# Altium PCB PTW_Mosfet_V1.0.PcbDoc
Units mm, origin at the board's own origin, x right, y up, seen from the top; angles counter-clockwise.
Board outline 17.13 x 12.5 mm, 2 copper layers (Top Layer, Bottom Layer); 18 components, 13 nets, 86 pads, 35 vias.
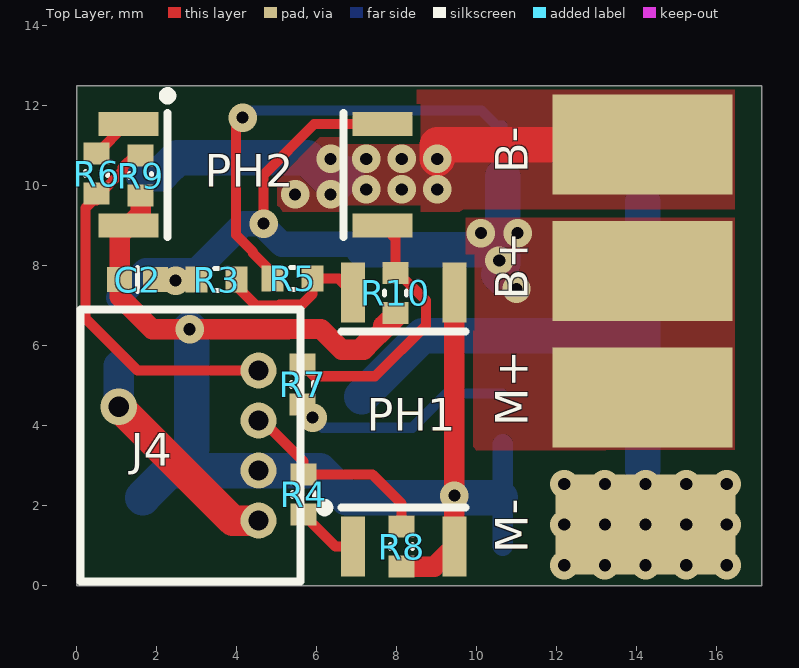
[diagram p0: Top Layer view]
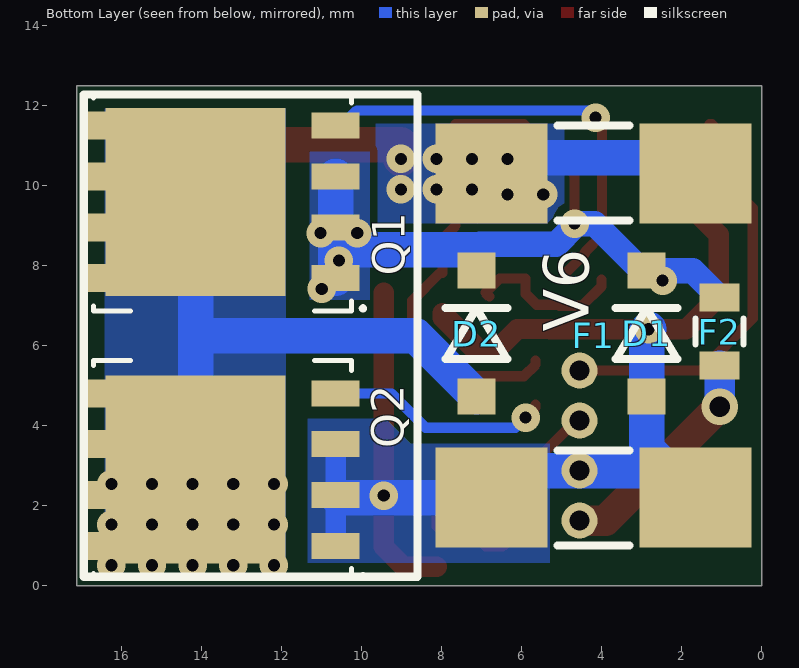
[diagram p1: Bottom Layer view, seen from below]
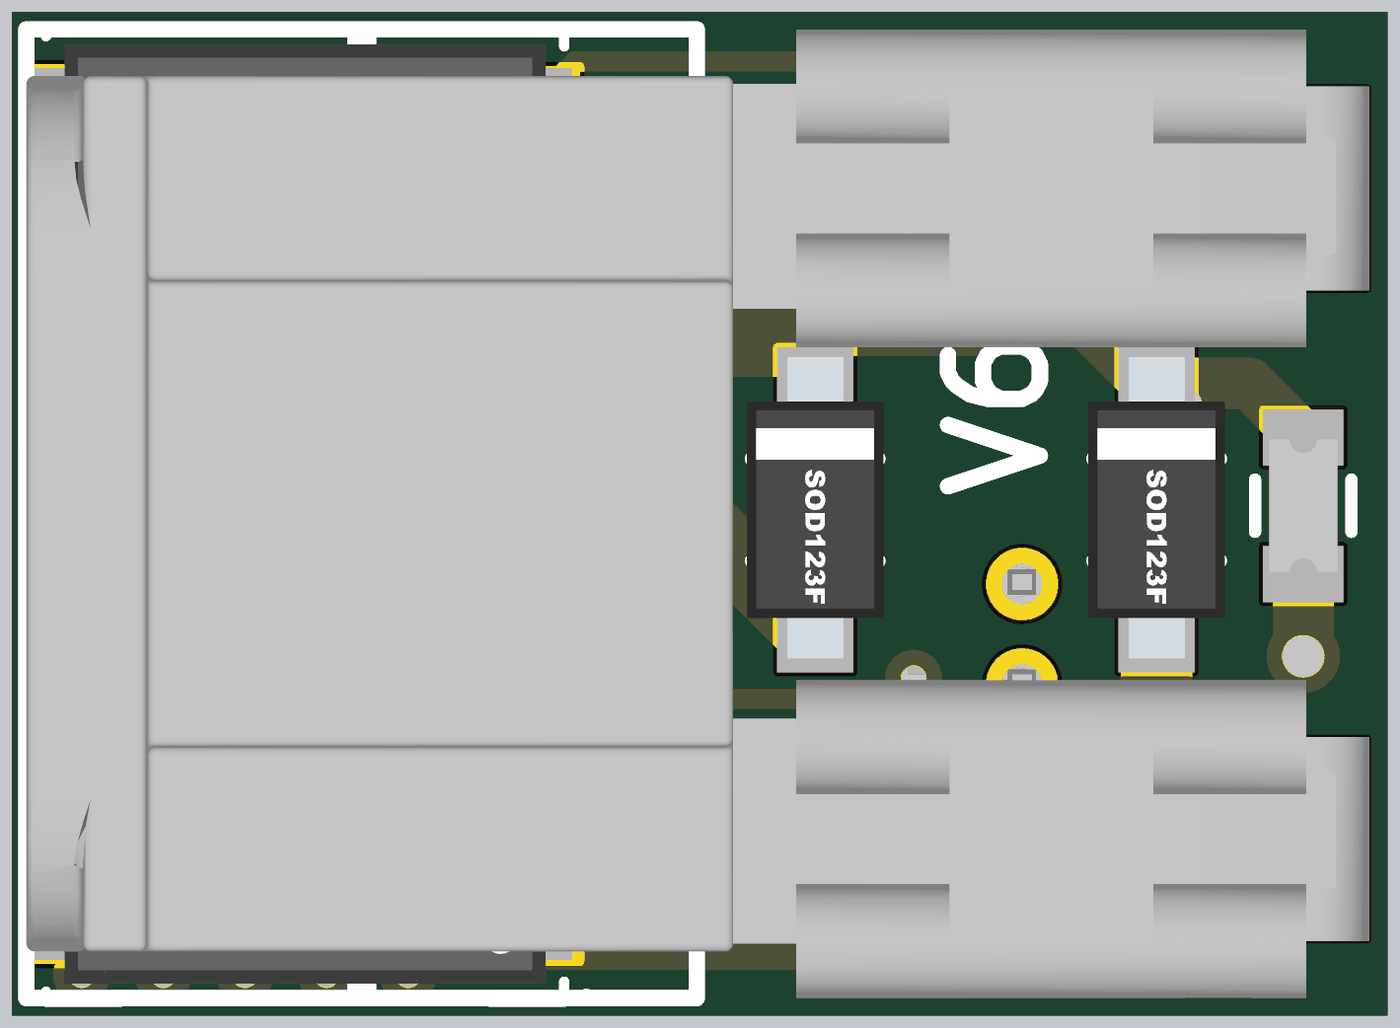
[diagram p2: 3D render of the assembled board from below, using the file's embedded part models]

## Layer stack, top to bottom
Top Solder: solder mask 0.0102, Solder Resist, Dk 3.5
Top Layer: signal copper 0.0356
Dielectric 1: dielectric 0.32, FR-4, Dk 4.8
Bottom Layer: signal copper 0.0356
Bottom Solder: solder mask 0.0102, Solder Resist, Dk 3.5

## Board outline
0,0 0,12.5 17.125,12.5 17.125,0

## Design rules (kind name [scope] priority, off if disabled: settings)
Clearance [All] p1: gap=0.203 ignorepadtopadclearanceinfootprint=FALSE except(0: Arc-Hole Track-Hole SMDPad-Hole THPad-Hole Via-Hole Fill-Hole Poly-Hole Region-Hole Text-Hole)
ComponentClearance [All] p1: gap=0 collisioncheckmode=3 verticalgap=0 showdistances=FALSE
DiffPairsRouting DiffPair_DiffPairsRouting [InDifferentialPair ('USB')] p1: maxlimit=0.254 minlimit=0.254 mostfreqgap=0.254 toplayer_minwidth=0.381 toplayer_maxwidth=0.381 toplayer_prefwidth=0.381 bottomlayer_minwidth=0.381 bottomlayer_maxwidth=0.381 bottomlayer_prefwidth=0.381 maxuncoupledlength=12.7
DiffPairsRouting [All] p2: maxlimit=10 minlimit=0.152 mostfreqgap=0.152 toplayer_minwidth=0.381 toplayer_maxwidth=0.381 toplayer_prefwidth=0.381 bottomlayer_minwidth=0.381 bottomlayer_maxwidth=0.381 bottomlayer_prefwidth=0.381 maxuncoupledlength=12.7
FabricationTestPointUsage FabricationTestPointUsage_1 [All] p1: valid=0 allowmultiple=FALSE
FabricationTestpoint FabricationTestpoint_1 [All] p1: side=3 testpointundercomponent=TRUE minsize=1.016 maxsize=2.54 preferedsize=1.524 minholesize=0 maxholesize=1.016 preferedholesize=0.813 testpointgrid=0.025 allowsidetop=TRUE allowsidebottom=TRUE usegrid=TRUE gridtolerance=0
HoleSize [All] p1: absolutevalues=TRUE maxlimit=6 minlimit=0.305 maxpercent=80.000 minpercent=20.000
HoleSize FabricationTestpoint [All] p2 off: absolutevalues=TRUE maxlimit=2.54 minlimit=0.025 maxpercent=80.000 minpercent=20.000
HoleSize FabricationTestPointUsage [All] p3 off: absolutevalues=TRUE maxlimit=2.54 minlimit=0.025 maxpercent=80.000 minpercent=20.000
MatchedLengths DiffPair_MatchedLengths [InDifferentialPair ('USB')] p1: tolerance=25.4 checknetsindiffpair=TRUE checkdiffpairvsdiffpair=FALSE checkxsignals=FALSE checkothers=FALSE
MinimumSolderMaskSliver [All] p1: minsoldermaskwidth=0.152
PlaneClearance [All] p1: clearance=0.152
PlaneConnect [All] p1: planeconnectstyle=Direct reliefexpansion=0.4 reliefentries=4 reliefconductorwidth=0.15 reliefairgap=0.15
PolygonConnect [All] p1: connectstyle=Direct reliefconductorwidth=0.15 reliefentries=4 polygonreliefangle="90 Angle" airgapwidth=0.254
RoutingCorners [All] p1: cornerstyle=45-Degree minsetback=1.25 maxsetback=1.25
RoutingVias [All] p1: holewidth=0.305 width=0.711 viastyle="Through Hole" minholewidth=0.305 minwidth=0.711 maxholewidth=0.305 maxwidth=1.27
SilkToSilkClearance [All] p1: silktosilkclearance=0
SilkToSolderMaskClearance [All] p1: minsilkscreentomaskgap=0.152 clearancetoexposedcopper=FALSE
SolderMaskExpansion [All] p1: expansion=0.051
Width DiffPair_Width [InDifferentialPair('USB')] p1: maxlimit=0.254 minlimit=0.203 preferedwidth=0.203
Width [All] p2: maxlimit=10 minlimit=0.203 preferedwidth=0.203
19 further rules are at their usual default settings.

## Components (designator, comment, footprint, x,y, rotation, side; value= is the part's Value field where it differs from the comment)
C2 "0.1µF" CAPC0402(1005)60_N 1.525,7.65 r180 top
D1 "PMEG3020EH" SOD123F 2.875,6.3 r270 bottom
D2 "PMEG3020EH" SOD123F 7.125,6.3 r270 bottom
F1 "Keystone3569" Keystone3569 6.75,6.25 r270 bottom locked
F2 "MF-FSMF050X-2" "0603 _N" 1.05,6.35 r270 bottom
J4 "0530480410" 0530480410 4.075,3.5 r270 top locked
PH1 "PS2707A-1-F3-A" SOP-4 8.175,4.15 r90 top locked
PH2 "PS2707A-1-F3-A" SOP-4 4.475,10.27 r0 top locked
Q1 "BSC080P03LS" TDSON-8-1-Infineon 13.475,9.593 r90 bottom
Q2 "BSC011N03LS" TDSON-8-1-Infineon 13.475,2.9 r90 bottom
R3 "1k" RESC0402(1005)_N 3.5,7.65 r0 top
R4 "220R" RESC0402(1005)_N 5.675,2.275 r270 top
R5 "100R" RESC0402(1005)_N 5.4,7.675 r180 top
R6 "220R" RESC0402(1005)_N 0.5,10.3 r90 top
R7 "100R" RESC0402(1005)_N 5.65,5.025 r270 top
R8 "10k" RESC0402(1005)_N 8.125,0.975 r270 top
R9 "10k" RESC0402(1005)_N 1.6,10.25 r270 top
R10 "1k" RESC0402(1005)_N 7.976,7.315 r270 top

## Footprints (in the part's own frame and the unit in brackets; to place one, negate y for a bottom-side part, rotate by r counter-clockwise, add the part's x,y. Pads: shape width x height; smd on the part's side, far side on the other; paste and mask are expansions set on the pad)
"0603 _N" [mm] "Chip PTC, Body 1.65x0.85mm, IPC Medium Density"
  rect 0.7x1 smd: 1(-0.85,0) 2(0.85,0)
  Top Layer pour cut-out: -0.4,0.6 0.4,0.6 0.4,-0.6 -0.4,-0.6
  silkscreen extent -0.33,-0.6 0.33,0.6, body extent -0.82,-0.42 0.83,0.43, height 0.82
0530480410 [mm] "CONN HEADER 4POS 1.25MM VERT TIN"
  round 0.9 hole 0.5: 1(-1.875,0.475) 2(-0.625,0.475) 3(0.625,0.475) 4(1.875,0.475)
  silkscreen extent -3.4,-3.98 3.4,1.53, body extent -3.4,-3.98 3.35,1.53, height 3.55
CAPC0402(1005)60_N [mm] "Chip Capacitor, Body 1.0x0.5mm, Height 0.6mm, IPC Medium Density"
  rect 0.62x0.62 smd: 1(-0.45,0) 2(0.45,0)
  Top Layer pour cut-out: -0.1,0.325 0.1,0.325 0.1,-0.325 -0.1,-0.325
  silkscreen extent 0,-0.3 0,0.3, body extent -0.55,-0.3 0.55,0.3, height 0.6
Keystone3569 [mm] "BladeFuse Keystone3569"
  rect 2.5x2.8 smd: 1(-4.05,0) 1(-4.05,5.1) 2(4.05,0) 2(4.05,5.1)
  silkscreen extent -6.03,-10.2 6.03,3.45, body extent -6.03,-10.2 6.03,6.52, height 3.85
RESC0402(1005)_N [mm] "Chip Resistor, Body 1.0x0.5mm, IPC Medium Density"
  rect 0.55x0.65 smd: 1(-0.5,0) 2(0.5,0)
  Top Layer pour cut-out: -0.175,0.3 0.175,0.3 0.175,-0.3 -0.175,-0.3
  silkscreen extent -0.05,-0.28 0.05,0.28, body extent -0.52,-0.27 0.53,0.28, height 0.4
SOD123F [mm] "SOD123F, 2-Leads, Body 2.7x1.55mm, Height 1.2mm"
  rect 0.9x0.95 smd: 1(-1.575,0) 2(1.575,0)
  silkscreen extent -0.64,-0.77 0.64,0.77, body extent -1.9,-0.85 1.85,0.85, height 1.25
SOP-4 [mm] "SOP-4, 4-Leads, Body 4.4x4.0mm"
  rect 1.5x0.6 smd: 1(-3.175,1.27) 2(-3.175,-1.27) 3(3.175,-1.27) 4(3.175,1.27)
  silkscreen extent -2.29,-1.55 2.2,2.06, body extent -3.5,-2 3.5,2, height 1.81
TDSON-8-1-Infineon [mm] "TDSON, 8-Leads, Body 6.15x5.15mm, Pitch 1.27mm"
  rect 0.65x1.2 smd paste-10: 1(-1.905,-2.825) 2(-0.635,-2.825) 3(0.635,-2.825) 4(1.905,-2.825)
  rect 0.6x1 on Bottom Paste: 1(-1.905,-2.825) 2(-0.635,-2.825) 3(0.635,-2.825) 4(1.905,-2.825)
  rect 1.8x1.7 on Bottom Paste: 5(-1.192,1.725) 6(1.192,1.725) 8(-1.192,-0.375)
  rect 0.7x0.5 smd paste-10: 5(1.905,3.175) 6(0.635,3.175) 7(-0.635,3.175) 8(-1.905,3.175)
  rect 1.8x1.8 on Bottom Paste: 7(1.192,-0.325)
  rect 0.6x0.5 on Bottom Paste: 9(-1.905,3.175) 10(-0.635,3.175) 11(0.635,3.175) 12(1.905,3.175)
  rect 4.7x4.5 smd paste-20: 9(0,0.675)
  silkscreen extent -2.76,-3.61 2.73,3.22, body extent -2.62,-3.12 2.63,3.12, height 1.11

## Part data
C2: library part CAPC_25V_X5R_0.47µF_0402, "Capacitor SMD Cer 0.1µF 10% 25V X5R 0402", Betriebstemperatur="-55°C bis 85°C", Manufacturer=TDK, Manufacturer Part Number=C1005X5R1E105K050BC, Package / Case="0402 (1005 metric)", Temperaturwirkungsgrad=X5R, Tolerance=10%, Dicke=0.55mm, Spannung - Nenn=25V
D1 D2: "Diode Shottky 30V, 2A", Current - Peak Pulse=2A, Manufacturer="ON Semiconductor", Operating Temperature="-65°C ~ 150°C", ComponentLink1Description="Manufacturer URL", ComponentLink2Description=Datasheet, Manufacturer Part=PMEG3020EH
F1: "Keystone Blade Fuse SMD", Current hold=30A, Current Trip=50A, Package / Case=3569, Volt=16V, Material=Keystone, Peak=40A, Rmin="0.005 ~ 0.025Ohm", Trip-Time=5s
F2: "PTC 6V 0.5A (h), 1s (t) @ 1A", Current hold=0.5A, Current Trip=1A, Package / Case=0603, Volt=6V, Material="Bourns Inc.", Peak=40A, Rmin="0.1 ~ 0.8Ohm", Trip-Time=1s
J4: "Molex Picoblade, 3Pin THT Straight", ComponentLink1Description=Datasheet, ComponentLink1URL=http://www.molex.com/pdm_docs/sd/530470310_sd.pdf
PH1 PH2: "1-ch optocoupler 3.75kV", Betriebstemperatur="-55°C bis 100°C", Manufacturer=NEC, Package / Case=4-SOP, Chanel=1, ComponentLink1Description=Datasheet, ComponentLink1URL=http://www.cel.com/pdf/datasheets/ps2701a1.pdf, Input=DC, Isolation=3.75kV, Manufacturer Part Number=PS2707A-1-F3-A, Output=Transistor, Rise/Fall-time=5µs/7µs
Q1: "30V P-Channel OptiMOSPower-MOSFET", Current - Continuous Drain (Id) @ 25°C="16A (Ta), 30A (Tc)", Drain to Source Voltage (Vdss)=30V, Input Capacitance (Ciss) @ Vds="6140pF @ 15V", Package / Case=8-PowerTDFN, Rating=89W, Supplier Part Number 1=726-BSC080P03LSG, ComponentLink1Description=Datasheet, ComponentLink1URL=http://www.infineon.com/dgdl/BSC080P03LS+G_Rev1.03.pdf?folderId=db3a304314dca38901154a7313d21a66&fileId=db3a304314dca38901154a7800621a6c, ComponentLink2Description="Web Page", ComponentLink2URL=http://www.infineon.com/cms/en/product/power/mosfet/power-mosfet/p-channel-20v-250v/BSC080P03LS+G/productType.html?productType=db3a3044139a1b9f0113af5a501403f0, ComponentLink3Description="Package Page", ComponentLink3URL=http://www.infineon.com/dgdl/Infineon+-+Application+Note+-+PowerMOSFETs+-+OptiMOS%E2%84%A2+-+Recommendations+for+Board+Assembly+PG-T%28S%29DSON+Packages.pdf?folderId=db3a304314dca389011528372fbb12ac&fileId=db3a30433e30e4bf013e368e34f51779, FET Feature="Logic Level Gate", FET Type="MOSFET P-Channel, Metal Oxide", Gate Charge (Qg) @ Vgs="122.4nC @ 10V", Mounting Type="Surface Mount", Rds On (Max) @ Id, Vgs="8 mOhm @ 30A, 10V", Supplier 1=Mouser, Supplier 2=Digi-Key, Supplier Part Number 2="BSC080P03LS GCT-ND", Vgs(th) (Max) @ Id="1V @ 250µA"
Q2: "30V N-Channel OptiMOSPower-MOSFET", Current - Continuous Drain (Id) @ 25°C="37A (Ta), 100A (Tc)", Drain to Source Voltage (Vdss)=30V, Input Capacitance (Ciss) @ Vds="4700pF @ 15V", Package / Case=8-PowerTDFN, Rating=96W, Supplier Part Number 1=726-BSC011N03LS, ComponentLink1Description=Datasheet, ComponentLink1URL=http://www.infineon.com/dgdl/BSC011N03LS_Rev+1.2.pdf?folderId=db3a304313b8b5a60113cee8763b02d7&fileId=db3a30432c64a60d012cbb2c20ff02a0, ComponentLink2Description="Web Page", ComponentLink2URL=http://www.infineon.com/cms/en/product/power/mosfet/power-mosfet/n-channel-optimos-tm-20v-30v/BSC011N03LS/productType.html?productType=db3a304426e7f13b0127055776321af0, ComponentLink3Description="Package Page", ComponentLink3URL=http://www.infineon.com/dgdl/Infineon+-+Application+Note+-+PowerMOSFETs+-+OptiMOS%E2%84%A2+-+Recommendations+for+Board+Assembly+PG-T%28S%29DSON+Packages.pdf?folderId=db3a304314dca389011528372fbb12ac&fileId=db3a30433e30e4bf013e368e34f51779, FET Feature="Logic Level Gate", FET Type="MOSFET N-Channel, Metal Oxide", Gate Charge (Qg) @ Vgs="72nC @ 10V", Mounting Type="Surface Mount", Rds On (Max) @ Id, Vgs="1.1 mOhm @ 30A, 10V", Supplier 1=Mouser, Supplier 2=Digi-Key, Supplier Part Number 2=BSC011N03LSCT-ND, Vgs(th) (Max) @ Id="2.2V @ 250µA"
R3 R4 R5 R6 R7 R8 R9 R10: library part RES_0402, "R_0402", Manufacturer=?, Package / Case="0402 (1005 metric)", Ratings=1/10W, Tolerance=±?%, Manufacturer Part Number=?

## Free pads (board coordinates)
  rect 4.5x2.5 smd: 2(14.15,7.867) 3(14.224,1.524) 4(14.15,11.025) 5(14.15,4.708)

## Via types
v1: diameter 0.711, hole 0.305, Top Layer to Bottom Layer, tented both sides, 34 vias
v2: diameter 0.914, hole 0.508, Top Layer to Bottom Layer, tented both sides, 1 vias

## Nets (pads, with @x,y where several pads share a name; then routed paths per layer and width w, separated by ;. In a path a pad name is that pad's centre, name@x,y a point inside that pad or via, vN(x,y) a via of type N, cw(c..) or ccw(c..) an arc to the next point about the centre after c; other vN are vias at no path point)
B+: C2.1 D1.1 D2.1 F2.1 pad.2 pad.5 PH2.4 Q1.1@10.65,7.688 Q1.2@10.65,8.958 Q1.3@10.65,10.228 R3.1 | length 17.5
  Top Layer w0.254: v1(4.675,9.05) 4.675,10.275 5.94,11.54 PH2.4
  Bottom Layer w0.635: F2.1 1.725,7.875 D1.1 3,7.875 4.175,9.05 v1(4.675,9.05) 4.675,9.015 4.662,9.002 5.134,8.529 7.046,8.529 7.175,8.4
  Bottom Layer w0.889: 7.175,8.4 10.2,8.4 v1@10.109,8.491 ; Q1.1@10.556,7.781 Q1.1@10.65,7.688 ; Q1.1@10.594,8.006 10.65,8.063 10.65,8.814 10.65,8.958 Q1.3@10.65,10.228
  other v1: 10.998,7.417 2.475,7.625 10.566,8.128 10.109,8.814 11.024,8.814
B-: F1.1 pad.4 | length 11.2
  Top Layer w0.889: v1(9.017,10.668) 9.017,11.025 pad.4
  Bottom Layer w0.889: F1.1@1.65,10.3 2.125,10.3 2.522,10.697 5.763,10.697 6.455,10.005 F1.1@6.75,10.3
  other v1: 5.461,9.779 6.35,9.779 7.239,9.906 8.128,9.906 9.017,9.906 6.35,10.668 7.239,10.668 8.128,10.668
ECU: F2.2 J4.4 | length 5.7
  Top Layer w0.762: v2(1.05,4.475) 3.9,1.625 J4.4
  Bottom Layer w0.762: v2(1.05,4.475) F2.2
GND: C2.2 D1.2 F1.2 J4.3 PH1.2 PH1.3 PH2.2 Q2.1@10.65,0.995 Q2.2@10.65,2.265 Q2.3@10.65,3.535 R8.2 R9.2 R10.2 | length 35.4
  Top Layer w0.508: R9.2 1.6,9.3 PH2.2 1.075,8.775 C2.2 1.075,7.225 1.889,6.411 v1(2.825,6.411) 5.286,6.411 5.29,6.414 6.111,6.414 6.625,5.9 7.072,5.9 ; R8.2 8.945,0.475 PH1.2 v1(9.445,2.25) PH1.3 ; 7.072,5.9 7.177,5.9 7.394,6.118 ; 7.072,5.9 7.29,6.118 7.394,6.118 ; 7.394,6.118 7.662,6.386 ; 7.662,6.386 7.976,6.699 R10.2 7.662,6.502 7.662,6.386
  Bottom Layer w0.508: Q2.1@10.65,0.995 10.65,2.135 10.585,2.2 10.65,2.265 Q2.3@10.65,3.535
  Bottom Layer w0.889: F1.2@1.65,2.2 F1.2@2.325,2.875 ; v1(2.825,6.411) 2.875,6.361 D1.2 2.875,3.425 F1.2@2.325,2.875 ; Q2.2@10.585,2.2 6.75,2.2 6.075,2.875 J4.3 F1.2@2.325,2.875
M-: D2.2 pad.3 Q1.5@16.65,11.498 Q1.6@16.65,10.228 Q1.7@16.65,8.958 Q1.8@16.65,7.688 Q1.9@14.15,9.593 Q2.5@16.65,4.805 Q2.6@16.65,3.535 Q2.7@16.65,2.265 Q2.8@16.65,0.995 Q2.9@14.15,2.9 | length 14.3
  Bottom Layer w0.889: D2.2 8.65,6.25 14.15,6.25 ; Q2.9@14.15,2.9 14.15,6.25 ; Q1.9@14.15,9.593 14.15,6.25
  other v1: 12.192,0.508 13.208,0.508 14.224,0.508 15.24,0.508 16.256,0.508 12.192,1.524 13.208,1.524 14.224,1.524 15.24,1.524 16.256,1.524 12.192,2.54 13.208,2.54 14.224,2.54 15.24,2.54 16.256,2.54
Net_N: J4.1 R6.1 R9.1 | length 9.8
  Top Layer w0.254: R9.1@1.725,10.75 R9.1 1.45,10.75 1.155,10.455 1.155,10.372 0.583,9.8 R6.1 0.5,9.63 0.413,9.63 0.22,9.437 0.22,6.68 1.525,5.375 J4.1
Net_P: J4.2 R4.1 R8.1 | length 5.2
  Top Layer w0.254: J4.2 4.65,4.125 5.675,3.1 R4.1 7.4,2.775 8.125,2.05 R8.1
NetPH1_1: PH1.1 R4.2 | length 1.6
  Top Layer w0.254: R4.2 6.475,0.975 PH1.1
NetPH1_4: PH1.4 R3.2 R5.1 | length 4.1
  Top Layer w0.254: R3.2 4,7.483 4.488,6.995 5.044,6.995 5.069,7.02 5.625,7.02 5.9,7.295 R5.1 6.555,7.675 PH1.4 PH1.4@6.805,7.225
NetPH2_1: PH2.1 R6.2 | length 1.1
  Top Layer w0.254: R6.2 1.24,11.54 PH2.1
NetPH2_3: PH2.3 R7.1 R10.1 | length 6.8
  Top Layer w0.254: R7.1@5.652,5.602 5.652,5.623 5.65,5.625 R7.1 5.943,5.232 7.46,5.232 8.738,6.51 8.738,7.12 8.043,7.815 R10.1 7.976,8.674 PH2.3
NetQ1_4: Q1.4@10.65,11.498 R5.2 | length 11.2
  Top Layer w0.254: v1(4.15,11.7) 3.989,11.539 3.989,8.766 4.412,8.343 4.412,8.305 4.9,7.817 R5.2
  Bottom Layer w0.254: v1(4.15,11.7) 4.33,11.88 10.117,11.88 10.5,11.498 Q1.4@10.65,11.498
NetQ2_4: Q2.4@10.65,4.805 R7.2 | length 5.6
  Top Layer w0.254: R7.2 5.65,4.45 v1(5.9,4.2)
  Bottom Layer w0.254: v1(5.9,4.2) 6.155,3.945 8.395,3.945 9.255,4.805 Q2.4@10.65,4.805
pads on no net: Q1.1@10.65,7.688 Q1.2@10.65,8.958 Q1.3@10.65,10.228 Q1.4@10.65,11.498 Q1.5@15.2,8.4 Q1.6@15.2,10.785 Q1.7@13.15,10.785 Q1.8@13.1,8.4 Q1.9@16.65,7.688 Q1.10 Q1.11 Q1.12 Q2.1@10.65,0.995 Q2.2@10.65,2.265 Q2.3@10.65,3.535 Q2.4@10.65,4.805 Q2.5@15.2,1.707 Q2.6@15.2,4.092 Q2.7@13.15,4.092 Q2.8@13.1,1.707 Q2.9@16.65,0.995 Q2.10 Q2.11 Q2.12

## Polygon pours and split planes (outlines as drawn)
B- on Bottom Layer "Bat-_bot" (solid, remove dead copper, pour order 9): 9.652,9.017 9.652,11.608 4.928,11.608 4.928,9.017
GND on Bottom Layer "GND_bot" (solid, remove dead copper, pour order 2): 11.35,0.575 11.35,4.175 9.4,4.175 8.775,3.55 5.3,3.55 5.3,0.575
B+ on Bottom Layer "Bat+_bot" (solid, remove dead copper, pour order 4): 11.3,7.15 11.3,10.85 9.8,10.85 9.8,7.15
M- on Bottom Layer "M-_bot" (solid, remove dead copper, pour order 0): 11.9,0.575 16.425,0.575 16.425,11.925 11.9,11.925
B- on Top Layer "Bat-_top" (solid, remove dead copper, pour order 7): 16.459,9.347 16.459,12.395 8.509,12.395 8.509,11.532 5.004,11.532 5.004,9.347
B+ on Top Layer "Bat+_top" (solid, remove dead copper, pour order 6): 16.45,3.4 16.45,9.2 11.4,9.2 9.728,9.2 9.728,3.376

## Silkscreen, mask and mechanical layers (free items; w line width, h text height)
Top Overlay:
  text "B-" at 11.278,10.312 h0.81 r90
  text "B+" at 11.278,7.146 h0.81 r90
  text "M+" at 11.278,3.979 h0.81 r90
  text "M-" at 11.278,0.813 h0.81 r90
Bottom Overlay:
  text "V6" at 4.318,6.35 h1.14 r270
Outline:
  the board outline again, w0.152